# EAGLE board ControlBoardV3-4L (EAGLE 6.5.0)
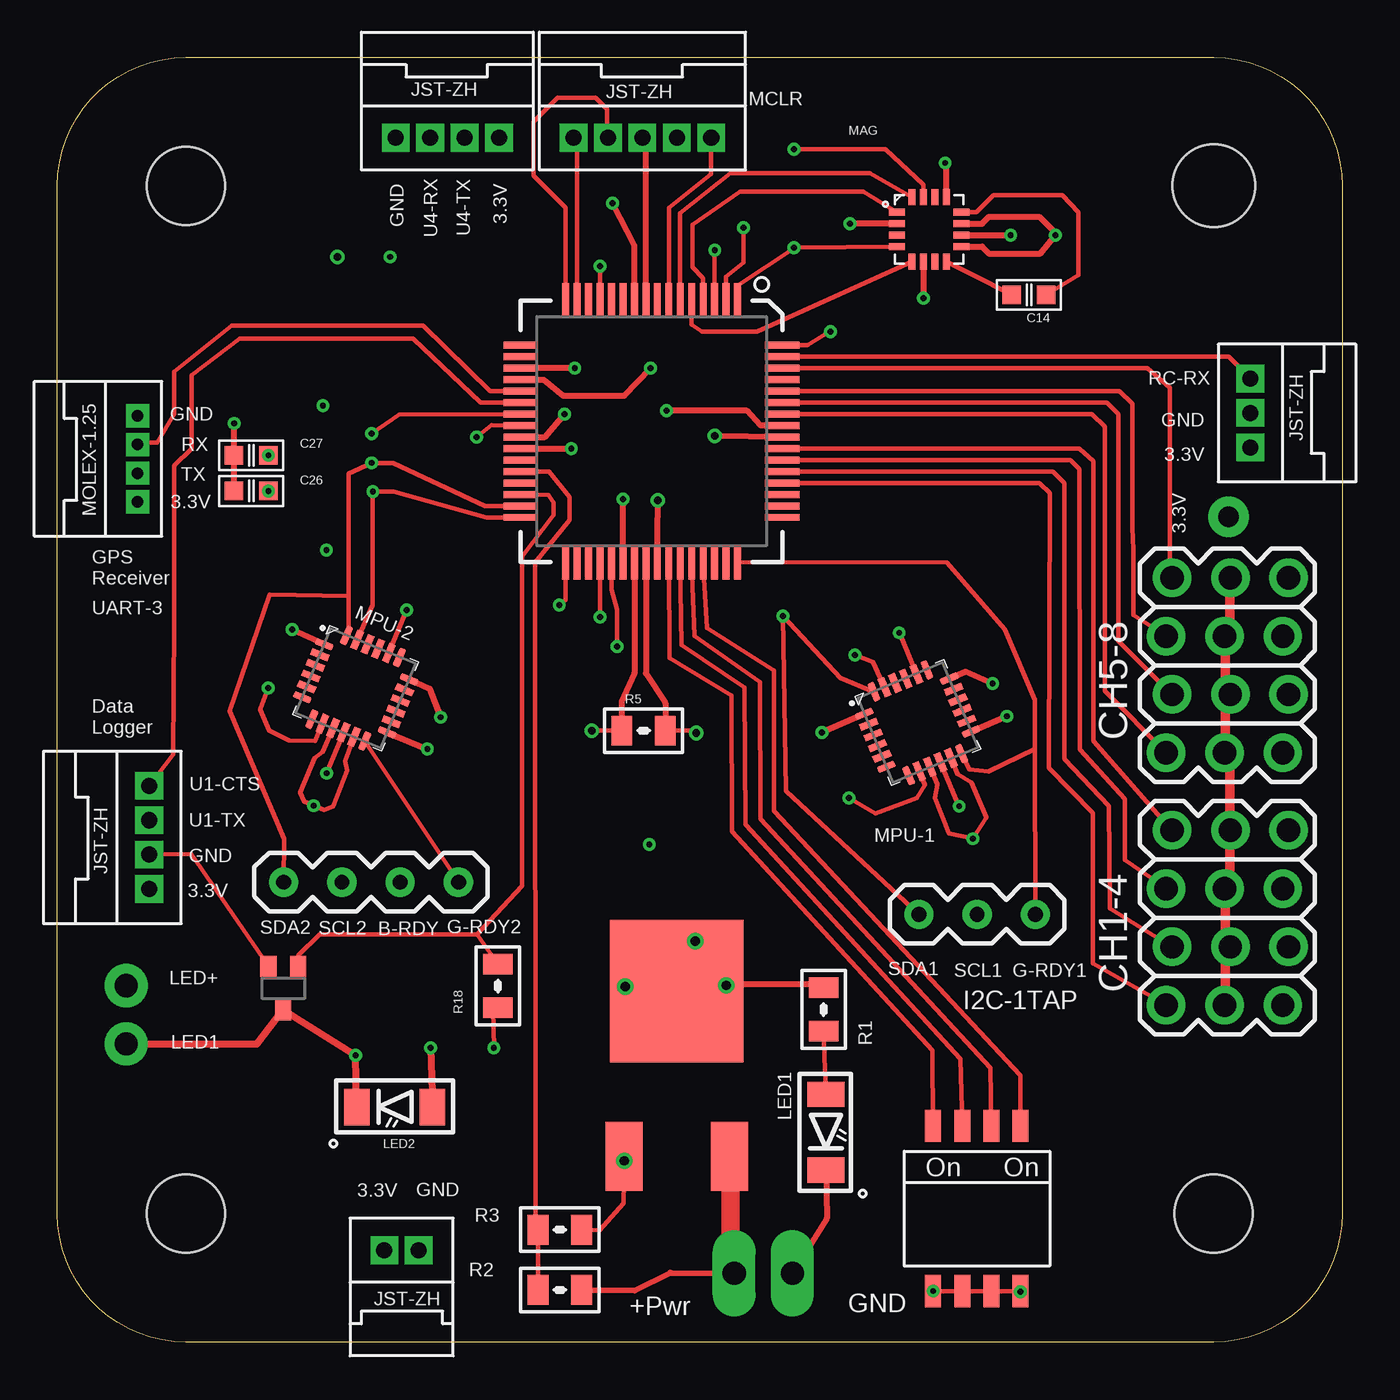
[diagram p0: board, top side]
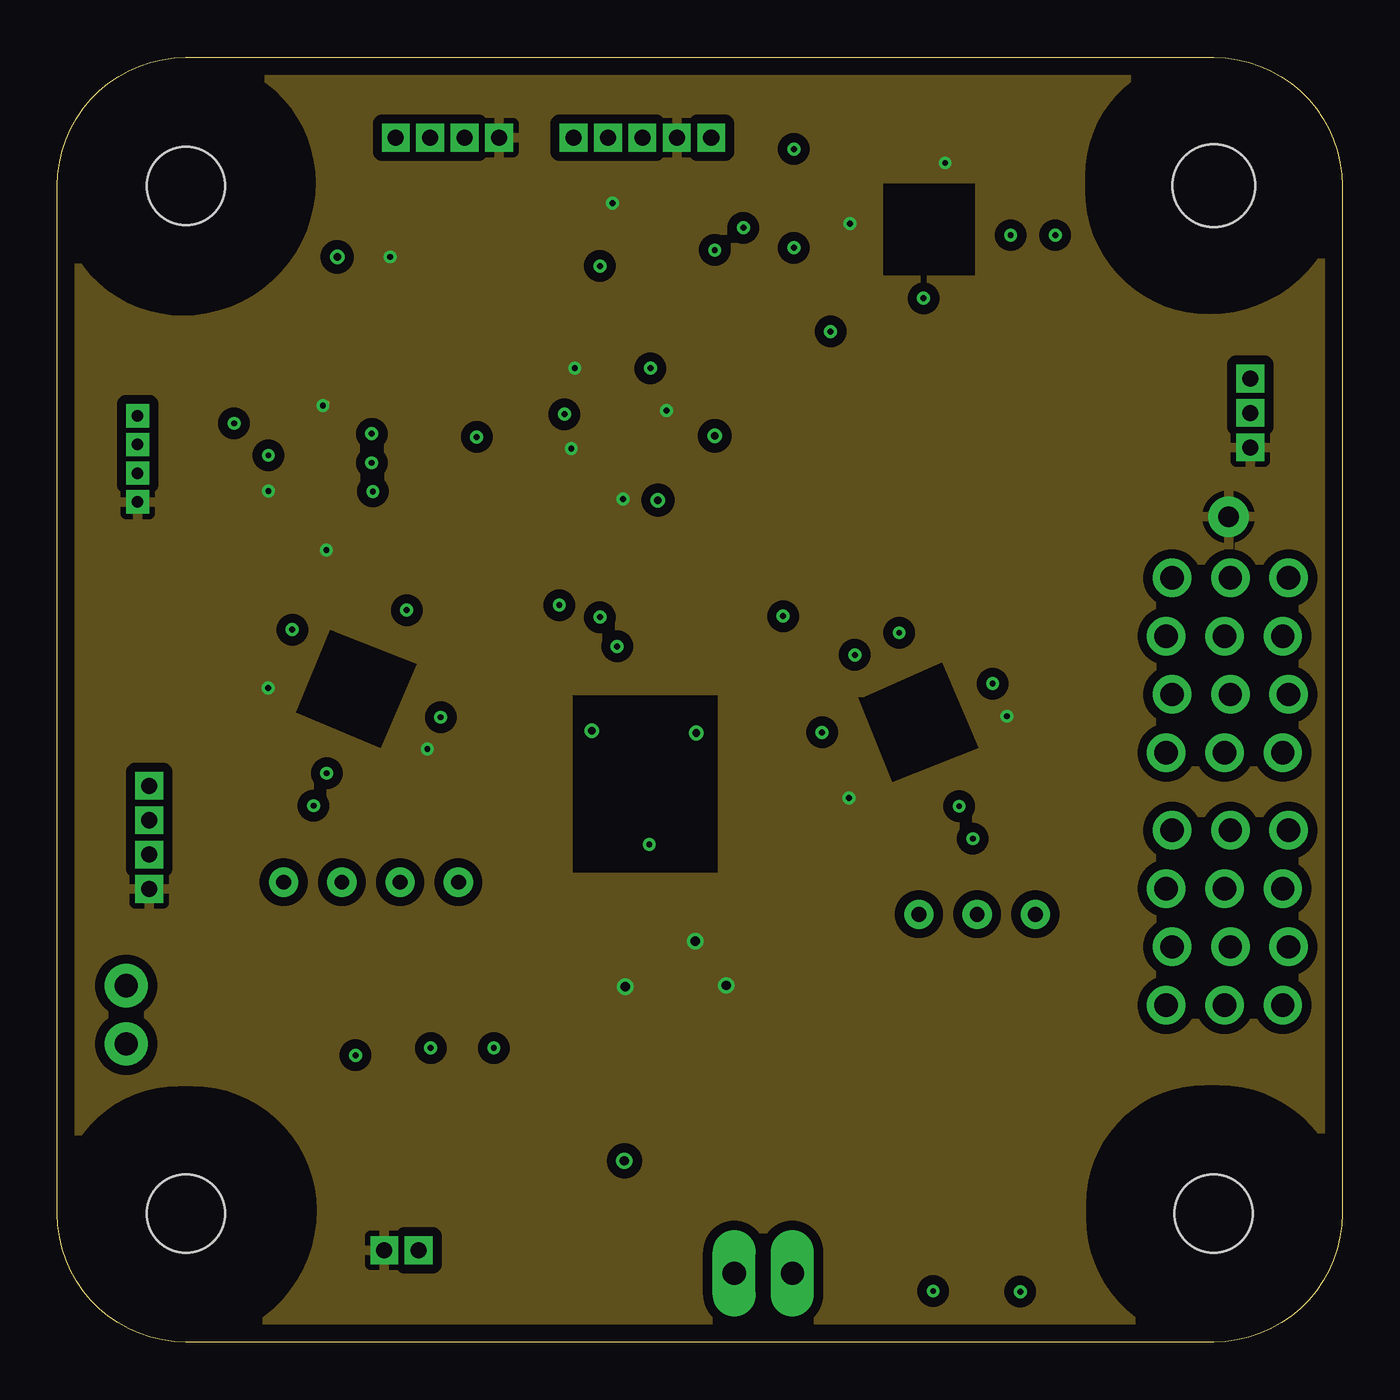
[diagram p1: board, inner layer Route2]
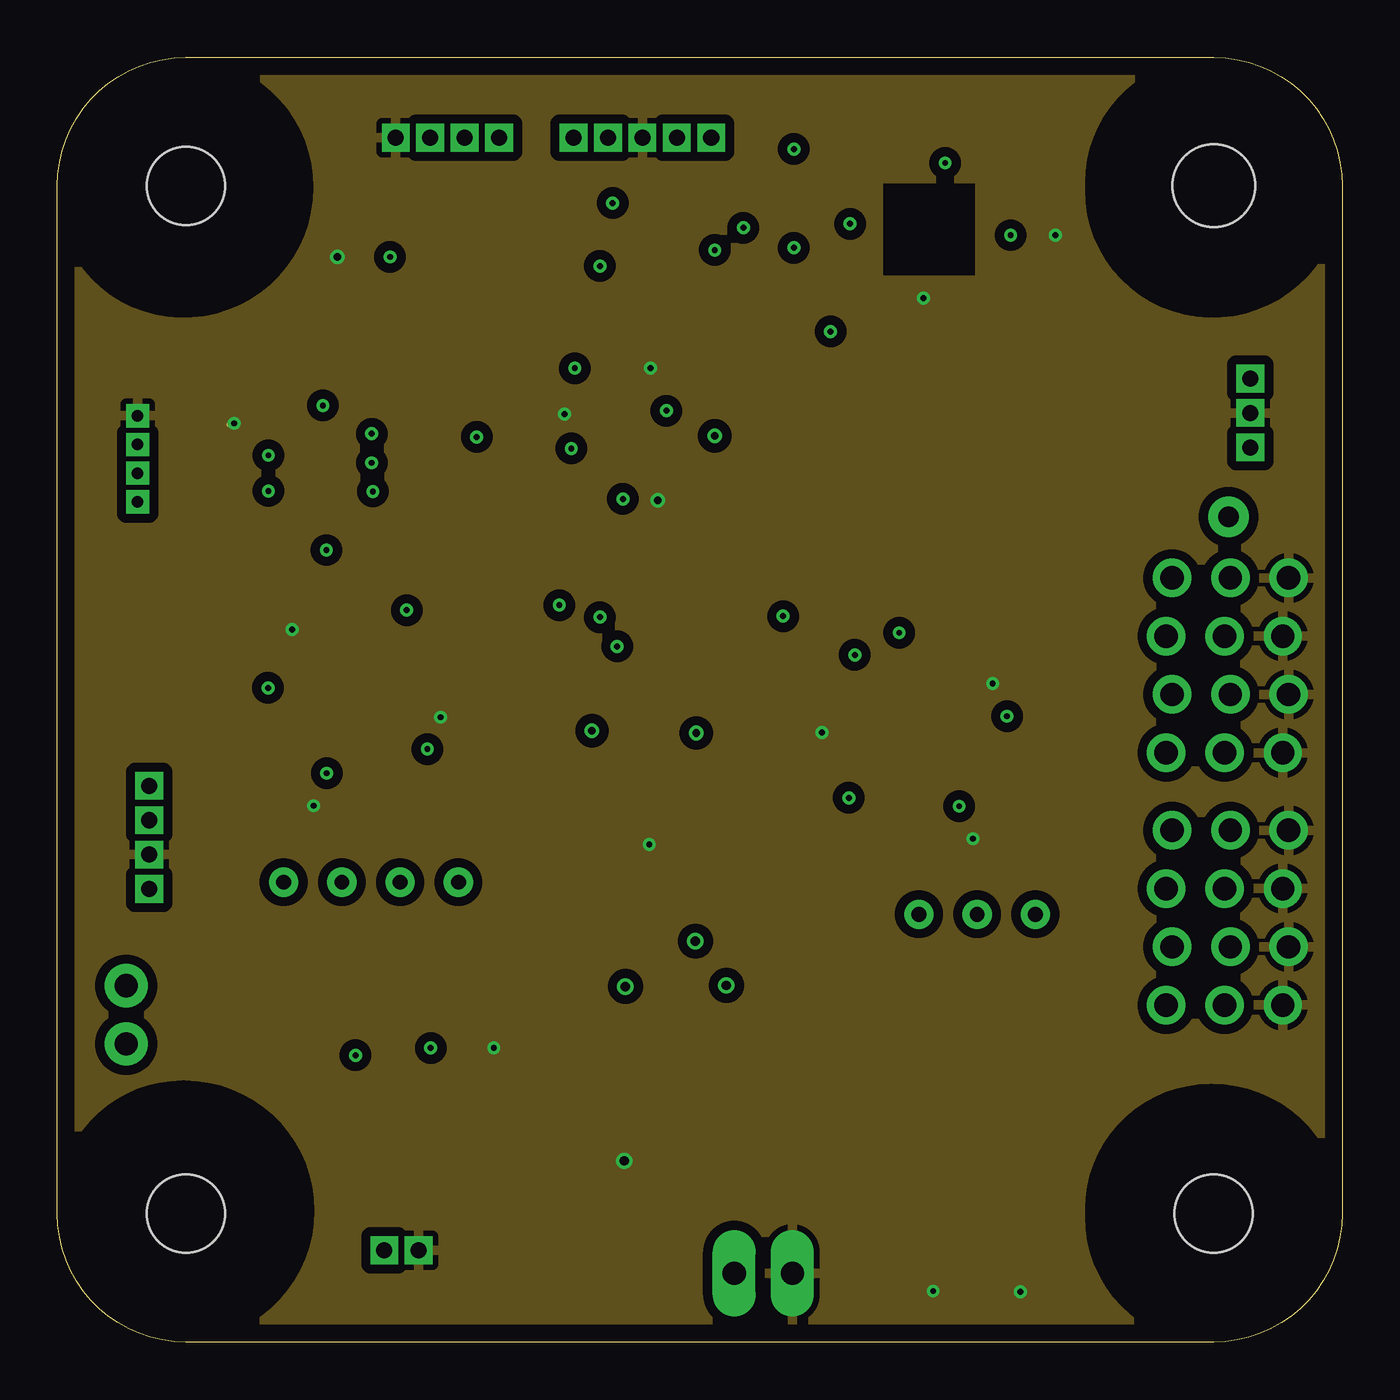
[diagram p2: board, inner layer Route15]
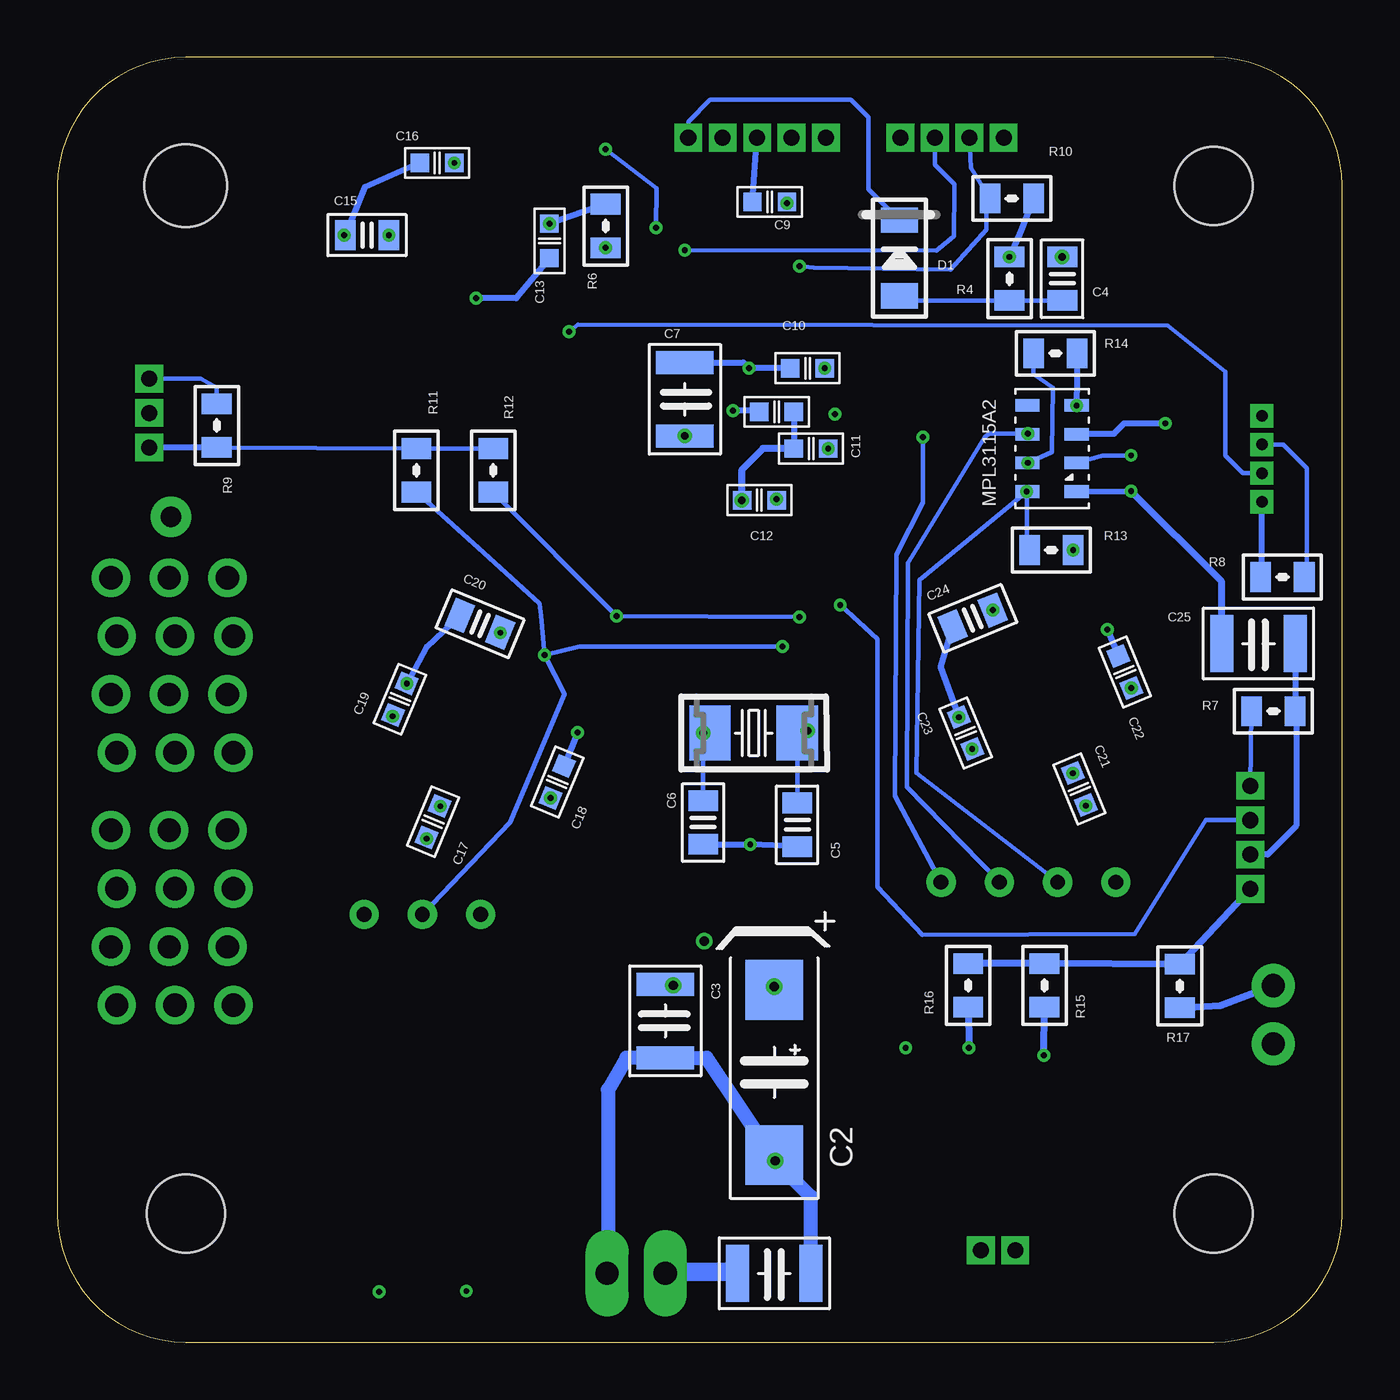
[diagram p3: board, bottom side, seen from below]

Size 56 x 56 mm. Coordinates in mm from the lower left corner, seen from the top.
Outline: 0,5.6 0,50.4 arc-90 5.6,56 50.4,56 arc-90 56,50.4 56,5.6 arc-90 50.4,0 5.6,0 arc-90 0,5.6
Copper layers (1*2+15*16): Top 0.035mm / dielectric 0.17mm / Route2 0.018mm / dielectric 1.2mm / Route15 0.018mm / dielectric 0.17mm / Bottom 0.035mm
Design rules "AZCustom4layer": minimum track width 8mil, minimum drill 10mil, track to track 6mil, track to pad 6mil, pad to pad 6mil, via to via 8mil, smd to smd 0mil, copper to edge 30mil, drill to drill 16mil, minimum pad ring 10mil, minimum via ring 6mil, stop-mask expansion 4mil, vias tented up to drill 0mil, thermal gap 10mil
Net classes: 0 default: width 0.178 mm, clearance 0.178 mm; 1 Power: width 0.254 mm, clearance 0.178 mm; 2 VDD-VSS: width 0.178 mm, clearance 0.178 mm
Holes 3.4 mm at 5.6,5.6 5.6,50.4 50.4,5.6
Holes 3.6 mm at 50.4,50.4
tRestrict: area 0,0 to 11.2,11.2; area 44.8,0 to 56,11.2; area 0,44.8 to 11.2,56; area 44.8,44.8 to 56,56
bRestrict: area 0,44.8 to 11.2,56; area 44.8,44.8 to 56,56; area 44.8,0 to 56,11.2; area 0,0 to 11.2,11.2

## Footprints (pad centres in the part's own frame; a part is rotated, then mirrored left to right if it is on the bottom)
1210_INCH-HS-CAP = smd 1 x 2.5: P$1 -1.6,0; P$2 1.6,0
TANT-D-7343 = smd 2.6 x 2.5: + -3.6,0; - 3.6,0
0805_INCH-HS-CAP = smd 0.9 x 1.3: 1 -0.95,0; 2 0.95,0
0603_INCH-HS-CAP = smd 0.8 x 0.8: 1 -0.75,0; 2 0.75,0
4CH-PWM-PPM-HEADER-PACKAGE = drill 1.016 pad 1.676: 1 3.81,2.413; 2 1.27,2.667; 3 -1.27,2.413; 4 -3.81,2.667; G1 3.81,-2.667; G2 1.27,-2.413; G3 -1.27,-2.667; G4 -3.81,-2.413; P1 3.81,-0.127; P2 1.27,0.127; P3 -1.27,-0.127; P4 -3.81,0.127
1206_INCH-HS-DIODE = smd 1.1 x 1.6: A -1.65,0; C 1.65,0
1X03-100MIL-MACHINED = drill 0.65 pad 1.27: 1 -2.58,0; 2 -0.04,0; 3 2.5,0
1X05-JST-ZH = drill 0.7 pad 1.016 square: 1 -3,0; 2 -1.5,0; 3 0,0; 4 1.5,0; 5 3,0
1X02-JST-ZH = drill 0.7 pad 1.016 square: 1 -0.75,0; 2 0.75,0
1X02_100MIL_NO_SILK = drill 1.016 pad 1.88: 1 0,0; 2 2.54,0
1206_INCH-HS-LED = smd 1.1 x 1.6: A -1.65,0; C 1.65,0
HMC5X83L-16LPCC = smd 0.7 x 0.3: 1 -1.4,0.75; 2 -1.4,0.25; 3 -1.4,-0.25; 4 -1.4,-0.75; 9 1.4,-0.75; 10 1.4,-0.25; 11 1.4,0.25; 12 1.4,0.75 | smd 0.3 x 0.7: 5 -0.75,-1.4; 6 -0.25,-1.4; 7 0.25,-1.4; 8 0.75,-1.4; 13 0.75,1.4; 14 0.25,1.4; 15 -0.25,1.4; 16 -0.75,1.4
MPL-3115A2 = smd 1.05 x 0.55: CAP -1.075,0.625; GND -1.075,-0.625; INT1 1.075,-0.625; INT2 1.075,-1.875; SCL 1.075,1.875; SDA 1.075,0.625; VDD -1.075,1.875; VIO -1.075,-1.875
MPU-6050_QFN-24-4MM2_AZ = smd 0.8 x 0.3: 1 -2,1.25; 2 -2,0.75; 3 -2,0.25; 4 -2,-0.25; 5 -2,-0.75; 6 -2,-1.25; 13 2,-1.25; 14 2,-0.75; 15 2,-0.25; 16 2,0.25; 17 2,0.75; 18 2,1.25 | smd 0.3 x 0.85: 7 -1.25,-1.975; 8 -0.75,-1.975; 9 -0.25,-1.975; 10 0.25,-1.975; 11 0.75,-1.975; 12 1.25,-1.975; 19 1.25,1.975; 20 0.75,1.975; 21 0.25,1.975; 22 -0.25,1.975; 23 -0.75,1.975; 24 -1.25,1.975
1X02_100MIL_LONGPADS = drill 1.016 pad 1.88 long: 1 0,0; 2 2.54,0
CRYSTAL-SMD-5.0X3.2 = smd 1.8 x 2.4: P$1 -1.9,0; P$2 1.9,0
0805_INCH-HS = smd 0.9 x 1.3: 1 -0.95,0; 2 0.95,0
TQFP64-10X10X1MM = smd 1.5 x 0.3: 1 -5.7,3.75; 2 -5.7,3.25; 3 -5.7,2.75; 4 -5.7,2.25; 5 -5.7,1.75; 6 -5.7,1.25; 7 -5.7,0.75; 8 -5.7,0.25; 9 -5.7,-0.25; 10 -5.7,-0.75; 11 -5.7,-1.25; 12 -5.7,-1.75; 13 -5.7,-2.25; 14 -5.7,-2.75; 15 -5.7,-3.25; 16 -5.7,-3.75; 33 5.7,-3.75; 34 5.7,-3.25; 35 5.7,-2.75; 36 5.7,-2.25; 37 5.7,-1.75; 38 5.7,-1.25; 39 5.7,-0.75; 40 5.7,-0.25; 41 5.7,0.25; 42 5.7,0.75; 43 5.7,1.25; 44 5.7,1.75; 45 5.7,2.25; 46 5.7,2.75; 47 5.7,3.25; 48 5.7,3.75 | smd 0.3 x 1.5: 17 -3.75,-5.7; 18 -3.25,-5.7; 19 -2.75,-5.7; 20 -2.25,-5.7; 21 -1.75,-5.7; 22 -1.25,-5.7; 23 -0.75,-5.7; 24 -0.25,-5.7; 25 0.25,-5.7; 26 0.75,-5.7; 27 1.25,-5.7; 28 1.75,-5.7; 29 2.25,-5.7; 30 2.75,-5.7; 31 3.25,-5.7; 32 3.75,-5.7; 49 3.75,5.7; 50 3.25,5.7; 51 2.75,5.7; 52 2.25,5.7; 53 1.75,5.7; 54 1.25,5.7; 55 0.75,5.7; 56 0.25,5.7; 57 -0.25,5.7; 58 -0.75,5.7; 59 -1.25,5.7; 60 -1.75,5.7; 61 -2.25,5.7; 62 -2.75,5.7; 63 -3.25,5.7; 64 -3.75,5.7
DPAK-ONSEMI = smd 1.6 x 3: 1 -2.3,-4.4; 3 2.3,-4.4 | smd 5.8 x 6.2: 2 0,2.8
DIP-4-HP = smd 0.7 x 1.4: 1H -1.905,3.6; 1L -1.905,-3.6; 2H -0.635,3.6; 2L -0.635,-3.6; 3H 0.635,3.6; 3L 0.635,-3.6; 4H 1.905,3.6; 4L 1.905,-3.6
1X04-100MIL-MACHINED = drill 0.65 pad 1.27: 1 -3.78,0; 2 -1.24,0; 3 1.3,0; 4 3.84,0
SOT-323 = smd 0.7 x 0.9: 1 -0.65,-0.95; 2 0.65,-0.95; 3 0,0.95
1X01_PRECISE = drill 0.9 pad 1.778: 1 0,0
1X04-JST-ZH = drill 0.7 pad 0.991 square: 1 -2.25,0; 2 -0.75,0; 3 0.75,0; 4 2.25,0
1X03-JST-ZH = drill 0.7 pad 1.016 square: 1 -1.5,0; 2 0,0; 3 1.5,0
1X04-MOLEX-PICOBLADE = drill 0.5 pad 0.813 square: 1 -1.875,0; 2 -0.625,0; 3 0.625,0; 4 1.875,0

## Placement (x,y rotation side)
C1  100 uF  [1210_INCH-HS-CAP]  24.75,3 0 bottom
C2  470 uF  [TANT-D-7343]  24.75,11.75 270 bottom
C3  100 uF  [1210_INCH-HS-CAP]  29.5,14 270 bottom
C4  47nF  [0805_INCH-HS-CAP]  12.2,46.35 90 bottom
C5  15pF  [0805_INCH-HS-CAP]  23.75,22.55 90 bottom
C6  15pF  [0805_INCH-HS-CAP]  27.85,22.65 90 bottom
C7  10uF  [1210_INCH-HS-CAP]  28.65,41.1 90 bottom
C8  0.1uF / 57  [0603_INCH-HS-CAP]  24.65,40.55 0 bottom
C9  0.1uF / 10  [0603_INCH-HS-CAP]  24.95,49.7 180 bottom
C10  0.1uF/19  [0603_INCH-HS-CAP]  23.3,42.45 180 bottom
C11  0.1uF/26  [0603_INCH-HS-CAP]  23.15,38.95 180 bottom
C12  0.1uF/38  [0603_INCH-HS-CAP]  25.4,36.7 180 bottom
C13  0.1uF  [0603_INCH-HS-CAP]  34.55,48 270 bottom
C14  0.22uF  [0603_INCH-HS-CAP]  42.35,45.65 180 top
C15  4.7uF  [0805_INCH-HS-CAP]  42.5,48.25 180 bottom
C16  0.1uF  [0603_INCH-HS-CAP]  39.45,51.4 180 bottom
C17  0.1uF  [0603_INCH-HS-CAP]  39.62,22.69 247.5 bottom
C18  10nF  [0603_INCH-HS-CAP]  34.21,24.42 247.5 bottom
C19  0.1uF  [0603_INCH-HS-CAP]  41.07,28.03 247.5 bottom
C20  2.2nF  [0805_INCH-HS-CAP]  37.58,31.31 157.5 bottom
C21  0.1uF  [0603_INCH-HS-CAP]  11.45,24.11 292.5 bottom
C22  10nF  [0603_INCH-HS-CAP]  9.47,29.21 292.5 bottom
C23  0.1uF  [0603_INCH-HS-CAP]  16.41,26.55 292.5 bottom
C24  2.2nF  [0805_INCH-HS-CAP]  16.1,31.54 202.5 bottom
C25  10uF  [1210_INCH-HS-CAP]  3.65,30.45 0 bottom
C26  0.1uF  [0603_INCH-HS-CAP]  8.45,37.1 180 top
C27  0.1uF  [0603_INCH-HS-CAP]  8.45,38.65 180 top
CH1-4  [4CH-PWM-PPM-HEADER-PACKAGE]  51,18.5 90 top
CH5-8  [4CH-PWM-PPM-HEADER-PACKAGE]  51,29.5 90 top
D1  DIODE_1206  [1206_INCH-HS-DIODE]  19.3,47.25 90 bottom
I2C-1TAP  HEADER-03_MACHINED  [1X03-100MIL-MACHINED]  40.05,18.65 180 top
ICSP  JST-ZH  [1X05-JST-ZH]  25.5,52.5 0 top
JP1  [1X02-JST-ZH]  15,4 180 top
JP2  [1X02_100MIL_NO_SILK]  3,13 90 top
LED1  Power  [1206_INCH-HS-LED]  33.5,9.15 270 top
LED2  [1206_INCH-HS-LED]  14.7,10.25 180 top
MAG  HMC5983L  [HMC5X83L-16LPCC]  38,48.5 0 top
MPL3115A2  MPL-3115A2  [MPL-3115A2]  12.65,38.95 180 bottom
MPU-1  [MPU-6050_QFN-24-4MM2_AZ]  37.5,27 22.5 top
MPU-2  [MPU-6050_QFN-24-4MM2_AZ]  13,28.5 337.5 top
POWER  12V  [1X02_100MIL_LONGPADS]  29.5,3 0 top
Q1  12MHz  [CRYSTAL-SMD-5.0X3.2]  25.65,26.55 0 bottom
R1  1K  [0805_INCH-HS]  33.4,14.5 270 top
R2  3.3K  [0805_INCH-HS]  21.9,2.27 180 top
R3  1K  [0805_INCH-HS]  21.9,4.9 0 top
R4  4.7K  [0805_INCH-HS]  14.5,46.35 270 bottom
R5  1M  [0805_INCH-HS]  25.55,26.65 0 top
R6  47K  [0805_INCH-HS]  32.1,48.65 90 bottom
R7  47K  [0805_INCH-HS]  3,27.5 180 bottom
R8  47K  [0805_INCH-HS]  2.6,33.35 0 bottom
R9  47K  [0805_INCH-HS]  49.05,39.95 90 bottom
R10  47K  [0805_INCH-HS]  14.4,49.85 180 bottom
R11  1.5K  [0805_INCH-HS]  40.35,38 270 bottom
R12  1.5K  [0805_INCH-HS]  37,38 270 bottom
R13  1.5K  [0805_INCH-HS]  12.68,34.52 180 bottom
R14  1.5K  [0805_INCH-HS]  12.5,43.1 180 bottom
R15  39K  [0805_INCH-HS]  12.97,15.55 90 bottom
R16  1K  [0805_INCH-HS]  16.3,15.55 90 bottom
R17  470R  [0805_INCH-HS]  7.08,15.53 90 bottom
R18  68K  [0805_INCH-HS]  19.2,15.53 90 top
U$1  PIC24EP512GP806_TQFP64-10X10  [TQFP64-10X10X1MM]  25.9,39.7 270 top
U$2  NCP1117_DPAK  [DPAK-ONSEMI]  27,12.5 0 top
U$3  SWITCH-4_HALF-PITCH  [DIP-4-HP]  40.08,5.83 0 top
U$4  I2C-2 Tap  [1X04-100MIL-MACHINED]  13.7,20.05 180 top
U$5  N-MOSFET_SOT-323  [SOT-323]  9.85,15.43 180 top
U$6  TAP-01_PRECISE  [1X01_PRECISE]  51.05,35.98 0 top
UART-1  Data Logger  [1X04-JST-ZH]  4,22 90 top
UART-2  RC Receiver  [1X03-JST-ZH]  52,40.5 270 top
UART-3  GPS Receiver  [1X04-MOLEX-PICOBLADE]  3.5,38.5 90 top
UART-4  US-100 Receiver  [1X04-JST-ZH]  17,52.5 0 top

## Library data of the parts
C1-C27 CH1-4 CH5-8 D1 I2C-1TAP ICSP JP1 JP2 LED1 LED2 MAG MPL3115A2 MPU-1 MPU-2 POWER Q1 R1-R18 U$1-U$6 UART-1-UART-4 = AZ Custom

## Nets
+12V [Power]: C1.P$1 POWER.1 R2.1 U$2.3
B-RDY: MPL3115A2.INT1 U$1.23 U$4.2
BAT: R2.2 R3.1 U$1.28
BLI: R18.2 U$1.30 U$5.1
C-RESRV: C15.1 MAG.10
CAP: C27.1 MPL3115A2.CAP
CH1: CH1-4.4 U$1.52
CH2: CH1-4.3 U$1.53
CH3: CH1-4.2 U$1.54
CH4: CH1-4.1 U$1.55
CH5: CH5-8.4 U$1.58
CH6: CH5-8.3 U$1.59
CH7: CH5-8.2 U$1.60
CH8: CH5-8.1 U$1.62
CS: MAG.4 R6.1 U$1.1
CTS-U1: R7.2 U$1.22 UART-1.4
ESC-PWR: CH1-4.P1 CH1-4.P2 CH1-4.P3 CH1-4.P4 CH5-8.P1 CH5-8.P2 CH5-8.P3 CH5-8.P4
G-RDY1: I2C-1TAP.1 MPU-1.12 U$1.48
G-RDY2: MPU-2.12 U$1.24 U$4.1
GND: C1.P$2 C2.- C3.P$2 C4.2 C5.1 C6.1 C7.P$2 C8.2 C9.2 C10.2 C11.2 C12.2 C13.2 C15.2 C16.2 C17.2 C18.1 C19.1 C20.2 C21.2 C22.1 C23.1 C24.2 C25.P$2 C26.2 C27.2 CH1-4.G1 CH1-4.G2 CH1-4.G3 CH1-4.G4 CH5-8.G1 CH5-8.G2 CH5-8.G3 CH5-8.G4 ICSP.3 JP1.1 LED1.C MAG.6 MAG.9 MAG.11 MPL3115A2.GND MPU-1.1 MPU-1.9 MPU-1.11 MPU-1.18 MPU-2.1 MPU-2.9 MPU-2.11 MPU-2.18 POWER.2 R3.2 R7.1 R18.1 U$1.9 U$1.20 U$1.25 U$1.41 U$2.1 U$3.1L U$3.2L U$3.3L U$3.4L U$5.2 UART-1.2 UART-2.2 UART-3.4 UART-4.1
M-RDY: MAG.15 U$1.2
M-SDI: MAG.5 U$1.5
M-SDO: MAG.16 U$1.6
MCLR: D1.C ICSP.5 U$1.7
N$2: LED1.A R1.2
N$6: C21.1 MPU-2.10
N$7: C24.1 MPU-2.20
N$10: C17.1 MPU-1.10
N$11: JP2.2 R17.1
N$12: JP2.1 LED2.C R15.1 U$5.3
N$13: LED2.A R16.1
N$14: C4.1 D1.A R4.2
N$15: C20.1 MPU-1.20
OSC1: C5.2 Q1.P$2 R5.1 U$1.39
OSC2: C6.2 Q1.P$1 R5.2 U$1.40
PGC: ICSP.1 U$1.15
PGD: ICSP.2 U$1.16
RX-U2: R9.2 U$1.63 UART-2.1
RX-U3: R8.2 U$1.21 UART-3.3
RX-U4: R10.2 U$1.13 UART-4.2
SCK: MAG.1 U$1.4
SCL1: I2C-1TAP.2 MPU-1.23 R11.2 U$1.37
SCL2: MPL3115A2.SCL MPU-2.23 R13.2 U$1.32 U$4.3
SDA1: I2C-1TAP.3 MPU-1.24 R12.2 U$1.36
SDA2: MPL3115A2.SDA MPU-2.24 R14.2 U$1.31 U$4.4
SETC: C14.1 MAG.12
SETP: C14.2 MAG.8
SW1: U$1.42 U$3.1H
SW2: U$1.43 U$3.2H
SW3: U$1.44 U$3.3H
SW4: U$1.45 U$3.4H
TX-U1: U$1.33 UART-1.3
TX-U3: U$1.64 UART-3.2
TX-U4: U$1.3 UART-4.3
VCAP: C7.P$1 U$1.56
VDD: C2.+ C3.P$1 C8.1 C9.1 C10.1 C11.1 C12.1 C13.1 C16.1 C18.2 C19.2 C22.2 C23.2 C25.P$1 C26.1 ICSP.4 JP1.2 MAG.2 MAG.13 MPL3115A2.VDD MPL3115A2.VIO MPU-1.8 MPU-1.13 MPU-2.8 MPU-2.13 R1.1 R4.1 R6.2 R8.1 R9.1 R10.1 R11.1 R12.1 R13.1 R14.1 R15.2 R16.2 R17.2 U$1.10 U$1.19 U$1.26 U$1.38 U$1.57 U$2.2 U$6.1 UART-1.1 UART-2.3 UART-3.1 UART-4.4

## Tracks (layer width: path | path; a pad name or v marks a point on that pad's centre or on a via)
+12V
  Top 0.254: R2.1 25.18,2.25 26.73,3.02 POWER.1
  Top 0.305: 29.34,8.03 U$2.3 | 29.34,3.06 POWER.1 28.94,3.59
  Top 0.813: 29.34,3.06 29.34,8.03
  Bottom 0.305: 26.49,3.06 C1.P$1 | 29.34,3.06 POWER.1
  Bottom 0.813: 29.34,3.06 26.49,3.06
B-RDY  (via drill 0.25)
  Top 0.203: v13.7,39.6 14.9,40.42 U$1.23
  Bottom 0.203: MPL3115A2.INT1 13.72,39.6 v13.7,39.6 15.4,39.6 15.6,39.42 18.93,33.95 18.98,24.2 U$4.2
BAT
  Top 0.203: U$1.28 21.43,37.95 22.32,36.83 22.32,35.83 20.82,33.98 20.85,5.45 R3.1 R2.2
BLI
  Top 0.203: U$1.30 21.4,36.92 21.62,36.6 21.62,36.05 20.25,34.25 20.25,19.88 18.3,17.77 | 18.3,17.77 11.43,17.77 10.5,16.85 U$5.1 | R18.2 18.3,17.77
C-RESRV  (via drill 0.25)
  Top 0.254: MAG.10 C15.1
  other vias: 41.55,48.25
CAP  (via drill 0.25)
  Bottom 0.203: MPL3115A2.CAP 10.45,38.65 C27.1
  other vias: 9.2,38.65
CH1
  Top 0.203: U$1.52 42.8,37.45 43.25,37 43.23,25.02 45.13,23.07 45.12,16.5 CH1-4.4
CH2
  Top 0.203: U$1.53 43.4,37.95 43.9,37.45 43.9,25.42 45.83,23.37 45.88,18.9 CH1-4.3
CH3
  Top 0.203: U$1.54 44.15,38.45 44.55,38.05 44.58,25.83 46.52,23.68 46.52,21.02 CH1-4.2
CH4
  Top 0.203: U$1.55 44.55,38.95 45.15,38.4 45.15,26.2 CH1-4.1
CH5
  Top 0.203: U$1.58 45.1,40.45 45.65,39.9 45.65,28.37 CH5-8.4
CH6
  Top 0.203: U$1.59 45.75,40.95 46.25,40.45 46.25,30.57 CH5-8.3
CH7
  Top 0.203: CH5-8.2 46.9,31.7 46.9,34.55 46.85,35.5 46.85,40.9 46.3,41.45 U$1.60
CH8
  Top 0.203: U$1.62 47.5,42.45 48.5,41.6 48.5,33.4 CH5-8.1
CS  (via drill 0.25)
  Top 0.203: U$1.1 29.65,46.05 32.15,47.7 | 32.15,47.7 MAG.4 | R6.1 32.15,47.7
  other vias: 32.1,47.7
CTS-U1
  Top 0.203: U$1.22 18.45,40.95 15.5,43.75 7.95,43.75 5.85,42.15 5.85,38.95 5.1,38.2 5.1,31.27 5.05,25.62 UART-1.4
  Bottom 0.203: R7.2 UART-1.4
ESC-PWR
  Top 0.203: 50.9,17 51.1,17.2 CH1-4.P3 50.9,17.1 | 50.9,14.7 CH1-4.P4 | 50.9,19.7 CH1-4.P2 50.9,19.8 51.1,20 | 51.1,22.3 CH1-4.P1 51.1,22.4 | 50.9,28 51.1,28.2 CH5-8.P3 50.9,28.1 | 50.9,25.7 CH5-8.P4 50.9,25.6 51.1,25.4 | 50.9,30.7 CH5-8.P2 50.9,30.8 51.1,31 | 51.1,33.3 CH5-8.P1
  Top 0.406: 50.9,17 50.9,14.7 | 50.9,17.1 50.9,19.7 | 51.1,20 51.1,22.3 | 50.9,28 50.9,25.7 | 50.9,28.1 50.9,30.7 | 51.1,31 51.1,33.3 | 51.1,25.4 51.1,22.4
G-RDY1
  Top 0.203: MPU-1.12 39.76,24.95 40.58,24.87 42.61,25.86 | U$1.48 38.77,33.98 41.29,31.06 42.61,27.99 42.61,25.86 | I2C-1TAP.1 42.61,25.86
G-RDY2  (via drill 0.25)
  Top 0.203: U$1.24 18.93,39.98 v18.27,39.45 | MPU-2.12 U$4.1
  Bottom 0.203: v18.27,39.45 18.27,36.6 19.43,34.33 19.5,23.8 U$4.1
GND  (via drill 0.25, 0.33, 0.41)
  Top 0.203: MPU-1.11 39.23,24.77 39.83,24.38 40.5,22.87 v39.9,21.94 38.86,22.18 38.24,23.71 38.35,24.31 MPU-1.9 | MPU-2.9 11.56,25.72 11.21,25.46 10.59,23.95 10.75,23.56 v11.17,23.38 11.63,23.19 12.02,23.36 12.62,24.92 12.53,25.33 MPU-2.11 | U$3.1L U$3.2L U$3.3L 42.02,2.23 | U$3.4L v41.98,2.2 | R18.1 19,14.5 v19.02,12.82 | U$5.2 5.83,21.27 UART-1.2 | R3.2 23.62,4.88 24.68,6.05 v24.71,7.9
  Top 0.254: U$1.41 26.15,35.15 v26.18,36.7 | U$1.9 25.65,52.35 ICSP.3 | U$1.20 21.2,41.95 22.05,41.25 24.7,41.25 v25.85,42.45 | MAG.9 40.3,47.75 40.6,47.45 42.85,47.45 v43.5,48.25 C15.2 43.45,48.4 42.8,49.05 40.6,49.05 40.3,48.75 MAG.11 | MAG.6 v37.75,45.5 | LED1.C 33.54,5.4 POWER.2 | U$1.25 21.25,39.45 v22.1,40.45 | MPU-1.18 39.58,29.23 v40.76,28.71 | MPU-1.1 v33.33,26.58 | MPU-2.1 v10.24,31.05 | MPU-2.18 16.23,28.48 v16.71,27.24 | C26.2 C27.2 v7.7,40.05
  Top 0.305: v24.71,7.9 24.71,8.03 U$2.1 | 24.71,8.21 U$2.1 | 32.14,3.06 POWER.2 | 24.85,7.58 24.85,7.86 U$2.1
  Route15 0.203: v41.98,2.2 U$3.4L
  Route15 0.254: C15.2 v43.5,48.25 | v37.75,45.5 37.75,45.45 | v25.8,21.7 25.8,21.65 | v22.1,40.45 22.2,40.35 | v39.9,21.94 39.9,21.91 | 11.11,23.36 v11.17,23.38 | v7.7,40.05 7.7,40.1 7.6,40 7.5,40
  Bottom 0.203: C2.- v24.71,7.9
  Bottom 0.254: C10.2 v25.85,42.45 26.1,42.7 C7.P$2 | C12.2 v26.18,36.7 | C8.2 C11.2 | v43.5,48.25 C15.2 42.6,50.35 C16.2 | C13.2 36,45.5 v37.75,45.5 | C5.1 v25.8,21.7 C6.1 | UART-1.2 3.25,21.25 2,22.5 2,27.45 R7.1 C25.P$2 | C9.2 ICSP.3 | C19.1 v40.76,28.71 39.9,30.3 C20.2 | C17.2 v39.9,21.94 | v33.33,26.58 C18.1 | v10.24,31.05 C22.1 | C23.1 v16.71,27.24 17.5,29.43 C24.2 | C21.2 v11.17,23.38 | MPL3115A2.GND 11.55,39.6 9.95,39.6 9.5,40.05 v7.7,40.05
  Bottom 0.305: C11.2 25.25,38.95 26.18,38 v26.18,36.7
  Bottom 0.6: C1.P$2 23.15,6.34 v24.71,7.9 | 32,3.04 32,11 31.2,12.4 C3.P$2 27.7,12.4 v24.7,7.9
  Bottom 0.813: 32,3.04 POWER.2
  other vias: 12.2,47.3 38.17,2.23
  pour Route15 (isolate 0.406, rank 3): 0,0 0,56 56,56 56,55.5 56,0
M-RDY  (via drill 0.25)
  Top 0.203: U$1.2 29.15,46.45 29.9,47.05 v29.9,48.58 | MAG.15 37.75,50.45 36.1,52 v32.1,52
  Bottom 0.203: v29.9,48.58 29.89,50.3 v32.1,52
M-SDI
  Top 0.203: U$1.5 27.65,44.35 28.1,44.05 30.5,44.05 MAG.5
M-SDO
  Top 0.203: U$1.6 27.15,49.2 29.35,50.95 35.42,50.95 MAG.16
MCLR
  Top 0.203: U$1.7 26.65,49.45 28.5,50.9 ICSP.5 28.5,52.6
  Bottom 0.203: D1.C 20.65,50.25 20.65,53.4 21.4,54.15 27.55,54.15 28.5,53.2 ICSP.5
N$1
  cutout Route15: 50.34,56 50.25,56 arc90 44.8,50.55 44.8,50.19 arc88 50.19,44.66 arc92 56,50.31 56,50.34 arc90
  cutout Route15: 5.49,56 5.4,56 arc90 -0.05,50.55 -0.05,50.19 arc88 5.34,44.66 arc92 11.15,50.31 11.15,50.34 arc90
  cutout Route15: 5.54,11.4 5.45,11.4 arc90 0,5.95 0,5.59 arc88 5.39,0.06 arc92 11.2,5.71 11.2,5.74 arc90
  cutout Route15: 50.34,11.25 50.25,11.25 arc90 44.8,5.8 44.8,5.44 arc88 50.19,-0.09 arc92 56,5.56 56,5.59 arc90
N$2
  Top 0.203: R1.2 LED1.A
N$3
  cutout Route2: 36,50.5 40,50.5 40,46.5 36,46.5
N$4
  cutout Route15: 36,50.5 40,50.5 40,46.5 36,46.5
N$6  (via drill 0.25)
  Top 0.203: MPU-2.10 C21.1
  other vias: 11.74,24.8
N$7  (via drill 0.25)
  Top 0.203: MPU-2.20 C24.1
  other vias: 15.22,31.91
N$8
  cutout Route2: 12,31 15.65,29.55 14.1,25.9 10.4,27.45 11.9,31.05 12.05,31
N$9
  cutout Route2: 22.45,28.18 28.77,28.18 28.77,28.1 28.77,20.48 22.48,20.48 22.48,20.55 22.48,28.2
N$10  (via drill 0.25)
  Top 0.203: MPU-1.10 v39.3,23.36
  Bottom 0.203: v39.3,23.36 C17.1
N$11
  Bottom 0.305: R17.1 5.3,14.68 JP2.2
N$12  (via drill 0.25)
  Top 0.305: JP2.1 8.7,13 U$5.3 v13,12.5 LED2.C
  Bottom 0.305: v13,12.5 R15.1
N$13  (via drill 0.25)
  Top 0.305: v16.27,12.82 LED2.A
  Bottom 0.305: R16.1 v16.27,12.82
N$14
  Bottom 0.203: 12.2,45.45 C4.1 R4.2 19.1,45.4 D1.A
N$15  (via drill 0.25)
  Top 0.203: MPU-1.20 v36.7,30.92
  Bottom 0.203: v36.7,30.92 C20.1
N$16
  cutout Route2: 35.03,28.06 38.56,29.62 40.15,25.9 36.4,24.42 34.92,28.1
NC
  cutout Route2: 50.59,56 49.96,56 arc90 44.8,50.84 44.8,50.21 arc90 50.21,44.8 arc90 56,50.59 arc90
  cutout Route2: 5.84,55.95 5.21,55.95 arc90 0.05,50.79 0.05,50.16 arc90 5.46,44.75 arc90 11.25,50.54 arc90
  cutout Route2: 5.89,11.15 5.26,11.15 arc90 0.1,5.99 0.1,5.36 arc90 5.51,-0.05 arc90 11.3,5.74 arc90
  cutout Route2: 50.64,11.2 50.01,11.2 arc90 44.85,6.04 44.85,5.41 arc90 50.26,0 arc90 56.05,5.79 arc90
OSC1  (via drill 0.33)
  Top 0.203: 24.55,26.6 24.55,26.65 R5.1 v23.3,26.65
  Top 0.254: U$1.39 25.15,29.15 24.6,27.9 R5.1
  Bottom 0.203: C5.2 Q1.P$2 23.25,26.65 v23.3,26.65
OSC2  (via drill 0.33)
  Top 0.203: R5.2 27.75,26.65 v27.85,26.55
  Top 0.254: 26.55,26.65 R5.2 26.5,27.85 25.65,29.15 U$1.40
  Bottom 0.203: v27.85,26.55 Q1.P$1 27.75,26.65 v27.85,26.55 | v27.85,26.55 C6.2
PGC
  Top 0.203: U$1.15 22.65,52.35 ICSP.1
PGD
  Top 0.203: U$1.16 22.15,49.45 20.75,50.85 20.75,53.2 21.8,54.25 23.45,54.25 23.95,53.75 23.95,52.55 ICSP.2
RX-U2
  Top 0.203: U$1.63 51.05,42.95 UART-2.1
  Bottom 0.203: R9.2 49.05,41.6 49.75,42 UART-2.1
RX-U3
  Top 0.203: U$1.21 18.85,41.45 15.95,44.3 7.6,44.3 5.1,42.3 5.1,40.45 4.35,39.2 3.58,39.2 UART-3.3
  Bottom 0.203: R8.2 1.55,33.45 1.55,38.1 2.58,39.12 UART-3.3
RX-U4  (via drill 0.25)
  Top 0.203: U$1.13 v23.65,46.9
  Bottom 0.203: v23.65,46.9 23.02,46.83 17.07,46.75 15.5,48.5 15.5,49.7 R10.2 16.18,51.2 UART-4.2
SCK
  Top 0.203: U$1.4 28.15,46.38 27.68,46.85 27.68,48.7 29.75,50.15 35.12,50.15 MAG.1
SCL1  (via drill 0.25)
  Top 0.203: U$1.37 24.15,32.8 24.4,31.93 v24.4,30.32 | v34.76,29.95 35.55,29.65 MPU-1.23
  Bottom 0.203: v24.4,30.32 33.25,30.32 v34.76,29.95 | v34.76,29.95 34.91,31.66 34.98,32.2 37.17,34.2 R11.2 | I2C-1TAP.2 36.27,22.65 33.9,28.25 v34.76,29.95
SCL2  (via drill 0.25)
  Top 0.203: U$1.32 18.7,35.95 14.65,37.08 v13.75,37.08 13.75,32.12 MPU-2.23
  Bottom 0.203: MPL3115A2.SCL 13.8,37.15 | 13.75,37.05 MPL3115A2.SCL | R13.2 13.62,34.75 13.75,34.88 v13.75,37.08 | v13.75,37.08 18.43,33.23 18.55,24.8 U$4.3 | v13.75,37.08 MPL3115A2.SCL
SDA1  (via drill 0.25)
  Top 0.203: U$1.36 v23.65,31.6 | MPU-1.24 34.13,28.94 v31.63,31.64 31.75,24.02 I2C-1TAP.3
  Bottom 0.203: 37,37.02 R12.2 v31.63,31.64 v23.65,31.6
SDA2  (via drill 0.25)
  Top 0.203: U$1.31 18.65,36.45 14.62,38.33 v13.7,38.33 12.7,37.85 12.7,32.52 | MPU-2.24 12.7,31.1 12.7,32.52 | U$4.4 9.88,21.93 7.5,27.5 9.25,32.58 12.7,32.52
  Bottom 0.203: v13.7,38.33 13.75,38.38 13.8,38.38 MPL3115A2.SDA 12.65,38.8 12.6,41.6 13.45,42.2 R14.2
SETC
  Top 0.203: MAG.12 40.05,49.25 40.8,50 43.8,50 44.5,49.25 44.5,46.5 C14.1
SETP
  Top 0.203: MAG.8 39.85,46.55 C14.2
SW1
  Top 0.203: U$1.42 26.68,29.82 29.38,28.18 29.4,22.25 38.15,12.72 U$3.1H
SW2
  Top 0.203: U$1.43 27.2,30.38 29.95,28.52 30,22.57 39.35,12.35 U$3.2H
SW3
  Top 0.203: U$1.44 27.77,30.77 30.62,28.77 30.65,22.8 40.67,11.95 U$3.3H
SW4
  Top 0.203: U$1.45 28.32,31.12 31.23,29.27 31.23,23.15 41.98,11.62 U$3.4H
TX-U1  (via drill 0.25)
  Top 0.203: U$1.33 22.15,32.35 v21.88,32.12
  Bottom 0.203: v21.88,32.12 20.25,30.65 20.25,19.85 18.3,17.75 9.03,17.8 5.95,22.75 UART-1.3
TX-U3  (via drill 0.25)
  Top 0.203: U$1.64 32.7,43.45 33.65,44.05 v33.7,44.05
  Bottom 0.203: v33.7,44.05 33.3,44.35 7.6,44.3 5.1,42.3 5.1,38.65 4.33,37.88 UART-3.2
TX-U4  (via drill 0.25)
  Top 0.203: U$1.3 v28.65,47.6
  Bottom 0.203: v28.65,47.6 17.68,47.58 16.93,48.2 16.9,50.3 16.9,50.48 17.75,51.33 UART-4.3
VCAP  (via drill 0.33)
  Top 0.254: U$1.56 C7.P$1
  other vias: 28.65,39.5
VDD  (via drill 0.25, 0.41)
  Top 0.203: MPU-1.8 37.82,24.28 37.47,23.71 35.66,23.04 C18.2 | MPU-2.8 11.24,26.2 10.11,26.23 9.23,26.66 8.85,27.57 C22.2
  Top 0.254: U$1.10 25.15,47.8 v24.2,49.65 | C10.1 U$1.19 | U$1.26 C11.1 | U$1.38 v24.65,36.75 | U$1.57 30.65,39.95 30.05,40.6 v26.55,40.6 | MAG.2 C13.1 | MAG.13 38.75,51.35 C16.1 | U$2.2 28.86,15.3 v29.16,15.55 29.45,15.55 C3.P$1 33.25,15.6 R1.1 | MPU-1.13 v41.39,27.28 | MPU-2.13 C23.2
  Route2 0.254: v24.65,36.75 C12.1 | 14.5,47.2 R4.1 | 9.35,37.15 C26.1 | v11.57,40.83 11.53,40.83 11.72,40.92
  Bottom 0.203: R9.1 R11.1 R12.1
  Bottom 0.254: C12.1 v24.65,36.75 | C8.1 25.55,40.6 v26.55,40.6 | R8.1 3.5,33.4 UART-3.1 | R10.1 14,48.45 R4.1 | R9.1 UART-2.3 | v29.16,15.55 29.45,15.55 C3.P$1 | v24.2,49.65 C9.1 | R6.2 C13.1 | v41.39,27.28 C19.2 | MPL3115A2.VDD C26.1 | v11.57,40.83 11.55,40.85 11.55,40.83 v11.57,40.83 | R14.1 v11.57,40.83
  Bottom 0.305: v24.76,15.5 24.71,15.5 C2.+ | C25.P$1 5.25,33.15 C26.1 | UART-1.1 R17.2 R15.2 R16.2
  other vias: 22.55,42.45 22.4,38.95 34.55,48.75 38.7,51.4 14.5,47.3 27.81,17.48 34.5,23.73 9.18,28.51 16.12,25.85 9.2,37.1 11.72,34.52
  pour Route2 (isolate 0.406, rank 3): 0,0 0,56 56,56 56,55.5 56,0

## Text on the board
tPlace: MCLR | U4-RX | U4-TX | GND | 3.3V | RC-RX | GND | GND | RX | 3.3V | TX | 3.3V | 3.3V | GPS / Receiver | UART-3 | Data / Logger | U1-CTS | U1-TX | GND | 3.3V | SDA2 | SCL2 | B-RDY | G-RDY2 | LED+ | SDA1 | SCL1 | G-RDY1 | LED1 | 3.3V | GND | +Pwr | GND